# Altium PCB ap-pam-v4.PcbDoc (part 1 of 2)
Units mm, origin at the board's own origin, x right, y up, seen from the top; angles counter-clockwise.
Board outline 190.5 x 50.8 mm, 2 copper layers (Top Layer, Bottom Layer), stack 0.579 mm thick; 55 components, 33 nets, 351 pads, 1124 vias.
Unrouted connection lines stored in the file: 1.
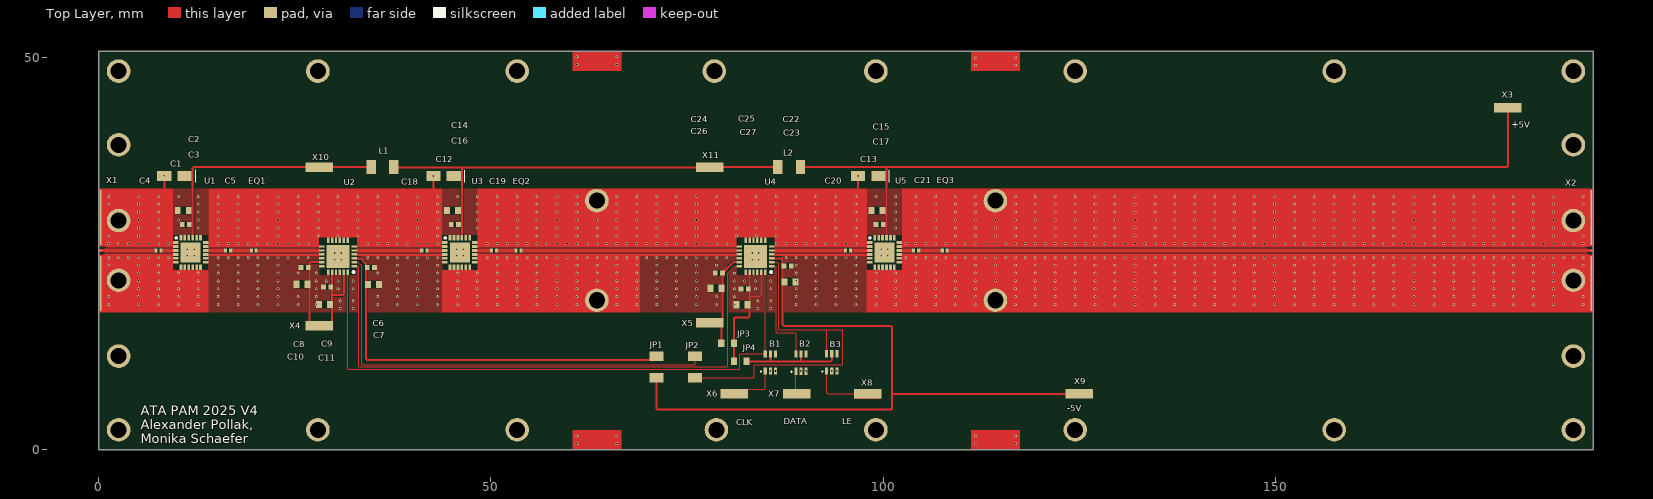
[diagram p0: Top Layer view]
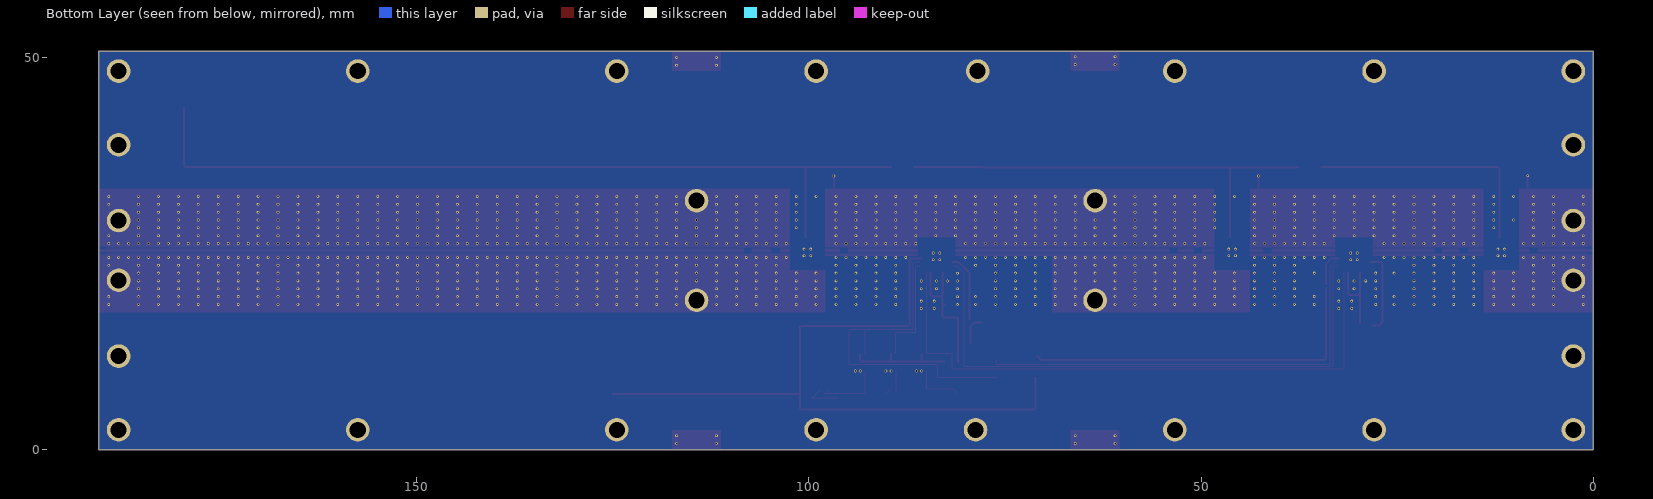
[diagram p1: Bottom Layer view, seen from below]
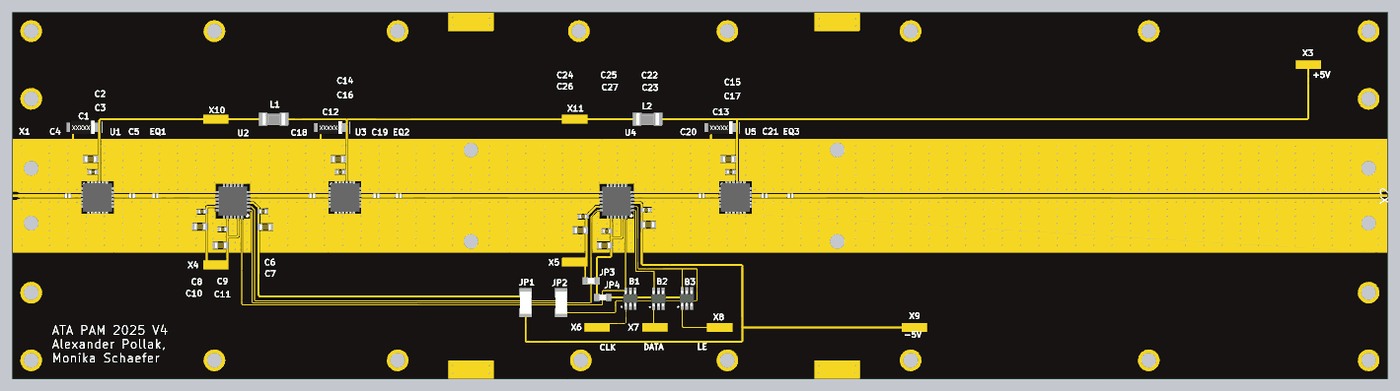
[diagram p2: 3D render of the assembled board from above, using the file's embedded part models]

## Layer stack, top to bottom
Top Layer: signal copper 0.0356
Dielectric 1: dielectric 0.508, Rogers 4350B, Dk 3.48
Bottom Layer: signal copper 0.0356

## Board outline
0,0 190.5,0 190.5,50.8 0,50.8

## Design rules (kind name [scope] priority, off if disabled: settings)
Clearance Clearance_1 [All] p1: gap=0.1 ignorepadtopadclearanceinfootprint=FALSE except(0.2: Via-Hole)
HoleSize [All] p1: absolutevalues=TRUE maxlimit=2.54 minlimit=0.2 maxpercent=80.000 minpercent=20.000
HoleToHoleClearance [All] p1: gap=0.2 allowstackedmicrovias=TRUE
MinimumSolderMaskSliver [All] p1: minsoldermaskwidth=0.1
PolygonConnect [All] p1: connectstyle=Direct reliefconductorwidth=0.254 reliefentries=4 polygonreliefangle="90 Angle" airgapwidth=0.254
RoutingVias [All] p1: holewidth=0.711 width=1.27 viastyle="Through Hole" minholewidth=0.2 minwidth=0.35 maxholewidth=0.711 maxwidth=1.27
SilkToSolderMaskClearance [IsPad] p1: minsilkscreentomaskgap=0.15 clearancetoexposedcopper=TRUE
SolderMaskExpansion [All] p1: expansion=0.102 istentingtop=FALSE
SupplyNets "Schematic Supply Nets" [InNet('GND')] p1: voltage=0.000
Width [All] p1: maxlimit=0.254 minlimit=0.1 preferedwidth=0.16
26 further rules are at their usual default settings.

## Components (designator, comment, footprint, x,y, rotation, side; value= is the part's Value field where it differs from the comment)
B1 "SN74LVC2G34MDCKREP" BUF_SN74LVC2G34MDCKREP 85.613,11.127 r90 top
B2 "SN74LVC2G34MDCKREP" BUF_SN74LVC2G34MDCKREP 89.508,11.103 r90 top
B3 "SN74LVC2G34MDCKREP" BUF_SN74LVC2G34MDCKREP 93.435,11.134 r90 top
C1 "4.7 uF" C4_7UF 9.661,34.908 r180 top value=4.7uF
C2 "1000 pF" C1000PF 10.786,30.49 r180 top value=1nF
C3 "100 pF" C100PF 11.101,28.71 r180 top
C4 "10nF" C10NF 7.62,25.4 r0 top
C5 "10nF" C10NF 16.51,25.4 r0 top
C6 "100 pF" C100PF 34.693,23.228 r0 top
C7 "1000 pF" C1000PF 35.008,21.06 r0 top value=1nF
C8 "100 pF" C100PF 26.237,23.209 r180 top
C9 "100 pF" C100PF 29.115,20.74 r180 top
C10 "1000 pF" C1000PF 25.922,21.102 r180 top value=1nF
C11 "1000 pF" C1000PF 28.8,18.514 r180 top value=1nF
C12 "4.7 uF" C4_7UF 43.963,34.888 r180 top value=4.7uF
C13 "4.7 uF" C4_7UF 98.087,34.888 r180 top value=4.7uF
C14 "1000 pF" C1000PF 45.087,30.49 r180 top value=1nF
C15 "1000 pF" C1000PF 99.212,30.49 r180 top value=1nF
C16 "100 pF" C100PF 45.402,28.71 r180 top
C17 "100 pF" C100PF 99.527,28.71 r180 top
C18 "10nF" C10NF 41.504,25.4 r0 top
C19 "10nF" C10NF 50.402,25.4 r0 top
C20 "10nF" C10NF 95.509,25.4 r0 top
C21 "10nF" C10NF 104.198,25.4 r0 top
C22 "100 pF" C100PF 87.814,23.419 r0 top
C23 "1000 pF" C1000PF 88.127,21.384 r0 top value=1nF
C24 "100 pF" C100PF 79.049,22.518 r180 top
C25 "100 pF" C100PF 82.328,20.488 r180 top
C26 "1000 pF" C1000PF 78.679,20.591 r180 top value=1nF
C27 "1000 pF" C1000PF 82.012,18.497 r180 top value=1nF
EQ1 "AEQ05472-10" EQ_AEQ05472 19.767,25.4 r0 top
EQ2 "AEQ05472-10" EQ_AEQ05472 53.507,25.4 r0 top
EQ3 "AEQ05472-10" EQ_AEQ05472 107.809,25.4 r0 top
JP1 "MCA12060Z0000ZP500" JP_MCA12060Z0000ZP500 71.084,10.549 r90 top value=0R
JP2 "MCA12060Z0000ZP500" JP_MCA12060Z0000ZP500 76.006,10.549 r90 top value=0R
JP3 "MCT06030Z0000ZP500" JP_small_MCT06030Z0000ZP500 80.162,13.574 r180 top value=0R
JP4 "MCT06030Z0000ZP500" JP_small_MCT06030Z0000ZP500 81.779,11.276 r180 top value=0R
L1 "HZ1206E152R-10" FB_HZ1206E152R-10 36.166,36.025 r0 top
L2 "HZ1206E152R-10" FB_HZ1206E152R-10 88.006,36.025 r0 top
U1 "MML098GQ4A" AMP_MML098GQ4A 11.735,25.15 r0 top
U2 "HMC1018ALP4E" ATT_HMC101018ALPE 30.499,24.65 r180 top
U3 "MML098GQ4A" AMP_MML098GQ4A 46.038,25.15 r0 top
U4 "HMC1018ALP4E" ATT_HMC101018ALPE 83.711,24.65 r180 top
U5 "MML098GQ4A" AMP_MML098GQ4A 100.163,25.15 r0 top
X1 "CPW Solder Pad" "CPW EDGE CONNECTOR" 0.25,25.4 r90 top
X2 "CPW Solder Pad" "CPW EDGE CONNECTOR" 190.25,25.4 r270 top
X3 "Solder Pad" "SOLDER PAD"#1 179.597,43.6 r90 top
X4 "Solder Pad" "SOLDER PAD"#1 28.126,15.808 r90 top
X5 "Solder Pad" "SOLDER PAD"#1 77.887,16.208 r270 top
X6 "Solder Pad" "SOLDER PAD"#2 83.275,7.144 r90 top
X7 "Solder Pad" "SOLDER PAD"#3 90.173,7.144 r90 top
X8 "Solder Pad" "SOLDER PAD"#4 96.192,7.111 r90 top
X9 "Solder Pad" "SOLDER PAD"#5 125,5.858 r90 top
X10 "Solder Pad" "Solder Pad"#1 23.126,35.975 r90 top
X11 "Solder Pad" "Solder Pad"#2 77.887,35.916 r90 top

## Footprints (in the part's own frame and the unit in brackets; to place one, negate y for a bottom-side part, rotate by r counter-clockwise, add the part's x,y. Pads: shape width x height; smd on the part's side, far side on the other; paste and mask are expansions set on the pad)
AMP_MML098GQ4A [mm]
  rect 0.7x0.35 smd: 1(-1.9,1.25) 2(-1.9,0.75) 3(-1.9,0.25) 4(-1.9,-0.25) 5(-1.9,-0.75) 6(-1.9,-1.25) 13(1.9,-1.25) 14(1.9,-0.75) 15(1.9,-0.25) 16(1.9,0.25) 17(1.9,0.75) 18(1.9,1.25)
  rect 0.7x0.35 on Top Paste: 1(-1.9,1.25) 2(-1.9,0.75) 3(-1.9,0.25) 4(-1.9,-0.25) 5(-1.9,-0.75) 6(-1.9,-1.25) 13(1.9,-1.25) 14(1.9,-0.75) 15(1.9,-0.25) 16(1.9,0.25) 17(1.9,0.75) 18(1.9,1.25)
  rect 0.35x0.7 smd: 7(-1.25,-1.9) 8(-0.75,-1.9) 9(-0.25,-1.9) 10(0.25,-1.9) 11(0.75,-1.9) 12(1.25,-1.9) 19(1.25,1.9) 20(0.75,1.9) 21(0.25,1.9) 22(-0.25,1.9) 23(-0.75,1.9) 24(-1.25,1.9)
  rect 0.35x0.7 on Top Paste: 7(-1.25,-1.9) 8(-0.75,-1.9) 9(-0.25,-1.9) 10(0.25,-1.9) 11(0.75,-1.9) 12(1.25,-1.9) 19(1.25,1.9) 20(0.75,1.9) 21(0.25,1.9) 22(-0.25,1.9) 23(-0.75,1.9) 24(-1.25,1.9)
  rect 2.55x2.55 smd: 25(0,0)
  rect 2.5x2.5 on Top Paste: 25(0,0)
  silkscreen extent -1.96,1.74 -1.76,1.94, body extent -2.05,-2.05 2.05,2.05, height 1.05
ATT_HMC101018ALPE [mm]
  rect 0.7x0.3 smd: 1(-2.05,1.25) 2(-2.05,0.75) 3(-2.05,0.25) 4(-2.05,-0.25) 5(-2.05,-0.75) 6(-2.05,-1.25) 13(2.05,-1.25) 14(2.05,-0.75) 15(2.05,-0.25) 16(2.05,0.25) 17(2.05,0.75) 18(2.05,1.25)
  rect 0.3x0.7 smd: 7(-1.25,-2.05) 8(-0.75,-2.05) 9(-0.25,-2.05) 10(0.25,-2.05) 11(0.75,-2.05) 12(1.25,-2.05) 19(1.25,2.05) 20(0.75,2.05) 21(0.25,2.05) 22(-0.25,2.05) 23(-0.75,2.05) 24(-1.25,2.05)
  rect 2.95x2.95 smd: 25(0,0)
  silkscreen extent -2.13,1.88 -1.88,2.12, body extent -2.05,-2.05 2.05,2.05, height 1
BUF_SN74LVC2G34MDCKREP [mm]
  rect 0.9x0.4 smd: 1(-1.1,0.65) 2(-1.1,0) 3(-1.1,-0.65) 4(1.1,-0.65) 5(1.1,0) 6(1.1,0.65)
  rect 0.9x0.4 on Top Paste: 1(-1.1,0.65) 2(-1.1,0) 3(-1.1,-0.65) 4(1.1,-0.65) 5(1.1,0) 6(1.1,0.65)
  silkscreen extent -1.16,1.2 -1.16,1.21, body extent -1.05,-1 1.05,1, height 1
C4_7UF [mm]
  rect 1.8x1.25 smd: 1(-1.3,0) 2(1.3,0)
  silkscreen extent -2.69,-0.76 -2.69,0.82, body extent -1.7,-0.95 1.7,0.95, height 1.84
C10NF [mm]
  rect 0.4x0.538 smd: 1(-0.325,0) 2(0.325,0)
  body extent -0.4,-0.3 0.4,0.3, height 0.14
C100PF [mm]
  rect 0.6x0.62 smd: 1(-0.46,0) 2(0.46,0)
  body extent -0.5,-0.25 0.5,0.25, height 0.55
C1000PF [mm]
  rect 0.75x0.94 smd: 1(-0.7,0) 2(0.7,0)
  body extent -0.8,-0.4 0.8,0.4, height 0.9
"CPW EDGE CONNECTOR" [mm]
  rect 0.1x0.2 smd paste-2539.97: 1(0,0)
  rect 7x0.2 smd paste-2539.97: 2(-4.217,0) 3(4.217,0)
  Top Layer region: -0.15,0.25 0.15,0.25 0.15,-0.25 0.269,-0.75 -0.269,-0.75 -0.15,-0.25
  Top Layer region: -0.55,0.25 -7.883,0.25 -7.883,-0.75 -0.383,-0.75 -0.55,-0.25
  Top Layer region: 0.55,0.25 7.883,0.25 7.883,-0.75 0.383,-0.75 0.55,-0.25
EQ_AEQ05472 [mm]
  rect 0.4x0.538 smd: 1(-0.3,0) 2(0.3,0)
  body extent -0.4,-0.3 0.4,0.3, height 0.14
FB_HZ1206E152R-10 [mm]
  rect 1.2x1.8 smd: 1(-1.45,0) 2(1.45,0)
  body extent -1.6,-0.8 1.6,0.8, height 1.3
JP_MCA12060Z0000ZP500 [mm]
  rect 1.256x1.758 smd paste+0 mask+0: 1(-1.376,0) 2(1.376,0)
  body extent -2.26,-1.13 2.25,1.13, height 0.25
JP_small_MCT06030Z0000ZP500 [mm]
  rect 0.8x1 smd: 1(-0.8,0) 2(0.8,0)
  body extent -0.77,-0.43 0.78,0.42, height 0.46
"SOLDER PAD"#1 [mm]
  rect 1.2x3.5 smd paste-2539.97: 1(0,0)
"SOLDER PAD"#2 [mm]
  rect 1.2x3.5 smd paste-2539.97: 1(0,2.275)
"SOLDER PAD"#3 [mm]
  rect 1.2x3.5 smd paste-2539.97: 1(0,1.173)
"SOLDER PAD"#4 [mm]
  rect 1.2x3.5 smd paste-2539.97: 1(0,-1.808)
"SOLDER PAD"#5 [mm]
  rect 1.2x3.5 smd paste-2539.97: 1(1.253,0)
"Solder Pad"#1 [mm]
  rect 1.2x3.5 smd paste-2539.97: 1(0.05,-5)
"Solder Pad"#2 [mm]
  rect 1.2x3.5 smd paste-2539.97: 1(0.109,0)

## Part data
B1 B2 B3: library part Buf_SN74LVC2G34MDCKREP, "Enhanced Product Dual Buffer Gate", Manufacturer_Name="Texas Instruments", Mouser Part Number=595-SN74L2G34MDCKREP, Datasheet Link=https://datasheet.datasheetarchive.com/originals/distributors/Datasheets-SFU2/DSASFU100028688.pdf, Geometry.Height=1.1mm, Manufacturer_Part_Number=SN74LVC2G34MDCKREP, Mouser Price/Stock=https://www.mouser.co.uk/ProductDetail/Texas-Instruments/SN74LVC2G34MDCKREP?qs=l4wu3mKjyfmQ87%252BWHVxJDg%3D%3D
C1 C12 C13: library part C7_4uF_TH3A475K010C2900, "Tantalum Capacitor, Polarized, Tantalum (dry/solid), 10V, 10% +Tol, 10% -Tol, 4.7uF, Surface Mount, 1306", Capacitor Type=Tantalum, Case/Package=1206, ESR (Equivalent Series Resistance)=2.9R, Leakage Current=500nA, Manufacturer="Vishay Sprague", Manufacturer Part Number=TH3A475K010C2900, Max Operating Temperature=150°C, Min Operating Temperature=-55°C, Package Shape=Rectangular, Package Style=SMTMeter, Rated DC Voltage (URdc)=10V, Ripple Current=160mA, Supplier Part Number=4924098, Tolerance  (fill in as +-)=10%, Category="Tantalum Capacitors", ComponentLink1Description=https://datasheet.ciiva.com:443/pdfs/VipMasterIC/IC/VISH/VISH-S-A0010085390/VISH-S-A0010085390-1.pdf?src-supplier=IHS+Markit, ComponentLink1URL=https://datasheet.ciiva.com:443/pdfs/VipMasterIC/IC/VISH/VISH-S-A0010085390/VISH-S-A0010085390-1.pdf?src-supplier=IHS+Markit, ComponentLink2Description=https://datasheet.ciiva.com/268/th3-268785.pdf?src-supplier=Digikey, ComponentLink2URL=https://datasheet.ciiva.com/268/th3-268785.pdf?src-supplier=Digikey, ComponentLink3Description=https://datasheet.ciiva.com/16360/th3-16360891.pdf?src-supplier=Future+Electronics, ComponentLink3URL=https://datasheet.ciiva.com/16360/th3-16360891.pdf?src-supplier=Future+Electronics, Dielectric Material=Tantalum, Height=1.6mm, JESD-609 Code=e3, Length=3.2mm, Mounting Technology="Surface Mount", Packaging="Tape and Reel", Pins=2, Polarity=Polarized, Pricing="2000=0.178, 4000=0.175, 6000=0.173, 8000=0.171, 10000=0.166 (USD)", Reach SVHC Compliant=Yes, Reference Standard=AEC-Q200, RoHS=Yes, RoHS Compliant=Yes, Stock=2000, Supplier="Future Electronics", Tan Delta=0.06, Terminal Finish=Tin, Termination="J BEND", Tolerance (fill in as +-)=10%, Width=1.6mm
C2 C7 C10 C11 C14 C15 C23 C26 C27: library part GCM1885C1H102FA16D, "Ceramic Capacitor, Multilayer, Ceramic, 50V, 1% +Tol, 1% -Tol, C0G, 30ppm/Cel TC, 0.001uF, Surface Mount, 0603", Capacitor Type=Ceramic, Case/Package=0603, Manufacturer=Murata, Max Operating Temperature=125°C, Min Operating Temperature=-55°C, Package Shape=Rectangular, Rated DC Voltage (URdc)=50V, Supplier Part Number=81-GCM1885C1H102FA6D, Temperature Characteristics Code=C0G, Tolerance  (fill in as +-)=1%, Category="Ceramic Capacitors", ComponentLink1Description=https://datasheet.ciiva.com:443/pdfs/VipMasterIC/IC/MURE/MURE-S-A0004370842/MURE-S-A0004372260-1.pdf?src-supplier=IHS+Markit, ComponentLink1URL=https://datasheet.ciiva.com:443/pdfs/VipMasterIC/IC/MURE/MURE-S-A0004370842/MURE-S-A0004372260-1.pdf?src-supplier=IHS+Markit, Dielectric Material=Ceramic, Manufacturer Part Number=GCM1885C1H102FA16D, Mounting Technology="Surface Mount", Multilayer=Yes, Packaging="Tape and Reel", Pins=2, Pricing="1=0.35, 10=0.229, 50=0.229, 100=0.138, 1000=0.092, 10000=0.074 (USD)", Reach SVHC Compliant=Yes, Reference Standard=AEC-Q200, RoHS=Yes, RoHS Compliant=Yes, Stock=27229, Supplier=Mouser, Termination=Wraparound, Tolerance (fill in as +-)=1%
C3 C6 C8 C9 C16 C17 C22 C24 C25: library part GRM1555C2A101FA01D, "Multilayer Ceramic Capacitors MLCC - SMD/SMT 100 pF 100 VDC 1% 0402 C0G (NP0)", Manufacturer=Murata, Supplier Part Number=81-GRM1555C2A11FA1D, Manufacturer Part Number=GRM1555C2A101FA01D, Pricing="1=0.18, 10=0.119, 50=0.119, 100=0.06, 1000=0.039, 10000=0.035 (USD)", RoHS=No, Stock=21646, Supplier=Mouser
C4 C5 C18 C19 C20 C21: library part C10nF_939113733510, Manufacturer=Murata, Manufacturer Part Number=939113733510, Supplier Part Number=961-939113733510, Pricing="1000=3.63, 10000=3.49 (USD)", RoHS=No, Stock=402, Supplier=Mouser
EQ1 EQ2 EQ3: library part EQ_AEQ05472-10, "Rf Filter Gain Equalizer 2SMD", Manufacturer="Knowles Dielectric Labs", Supplier Part Number=1761-1006-ND, ComponentLink1Description=http://www.mouser.com/ds/2/110/Dielectriclaboratories_EW_Series-340573.pdf?src-supplier=Mouser, ComponentLink1URL=http://www.mouser.com/ds/2/110/Dielectriclaboratories_EW_Series-340573.pdf?src-supplier=Mouser, ComponentLink2Description=http://www.knowlescapacitors.com/getattachment/69df7735-7ed2-4c4f-903b-a99acda4fa2d/Gain-Equalizers.aspx?src-supplier=Digikey, ComponentLink2URL=http://www.knowlescapacitors.com/getattachment/69df7735-7ed2-4c4f-903b-a99acda4fa2d/Gain-Equalizers.aspx?src-supplier=Digikey, Manufacturer Part Number=AEQ05472-10, Pricing="10=7.145, 20=6.5195, 30=6.203, 50=5.8498, 70=5.64214, 100=5.4415, 250=5.00556, 500=4.7401, 1000=4.51981 (USD)", RoHS=Yes, Stock=390, Supplier=Digikey
JP1 JP2: library part JP_MCA12060Z0000ZP500, "Fixed Resistor, Thin Film, 0.25W, 0ohm, Surface Mount, 1206", Case/Package=1206, Manufacturer=Vishay, Max Operating Temperature=125°C, Min Operating Temperature=-55°C, Package Height=0.55mm, Package Length=3.2mm, Package Shape=Rectangular, Package Width=1.6mm, Power=250mW, Rated Temperature=70°C, Resistor Type="FIXED RESISTOR", Supplier Part Number=594-MCA12060Z0000ZP5, Category="Chip SMD Resistors", Construction=Rectangular, JESD-609 Code=e3, Manufacturer Part Number=MCA12060Z0000ZP500, Mounting Technology="Surface Mount", Packaging="Tape and Reel", Pins=2, Pricing="1=0.44, 10=0.318, 50=0.245, 100=0.218, 1000=0.132, 10000=0.117 (USD)", Reach SVHC Compliant=Yes, Reference Standard=CECC40401-801, RoHS=Yes, RoHS Compliant=Yes, Stock=3183, Supplier=Mouser, Technology="THIN FILM", Terminal Finish=Nickel, Termination=Wraparound
JP3 JP4: library part JP_small_MCT06030Z0000ZP500, "Fixed Resistor, Thin Film, 0.1W, 0ohm, Surface Mount, 0603", Case/Package=0603, Manufacturer="Vishay Beyschlag", Max Operating Temperature=125°C, Min Operating Temperature=-55°C, Package Height=0.45mm, Package Length=1.55mm, Package Shape=Rectangular, Package Width=0.85mm, Power=100mW, Rated Temperature=70°C, Resistor Type="FIXED RESISTOR", Supplier Part Number=594-MCT06030Z0000ZP5, Category="Chip SMD Resistors", ComponentLink1Description=https://datasheet.ciiva.com:443/pdfs/VipMasterIC/IC/VISH/VISH-S-A0002473667/VISH-S-A0002473667-1.pdf?src-supplier=IHS+Markit, ComponentLink1URL=https://datasheet.ciiva.com:443/pdfs/VipMasterIC/IC/VISH/VISH-S-A0002473667/VISH-S-A0002473667-1.pdf?src-supplier=IHS+Markit, ComponentLink2Description=https://datasheet.ciiva.com/48524/mc-pro-48524221.pdf?src-supplier=Avnet, ComponentLink2URL=https://datasheet.ciiva.com/48524/mc-pro-48524221.pdf?src-supplier=Avnet, ComponentLink3Description=https://datasheet.ciiva.com/8901/mc-pro-8901833.pdf?src-supplier=Avnet, ComponentLink3URL=https://datasheet.ciiva.com/8901/mc-pro-8901833.pdf?src-supplier=Avnet, ComponentLink4Description=https://datasheet.ciiva.com/8898/mc-pro-8898078.pdf?src-supplier=Avnet, ComponentLink4URL=https://datasheet.ciiva.com/8898/mc-pro-8898078.pdf?src-supplier=Avnet, ComponentLink5Description=https://datasheet.ciiva.com/2471/mc-pro-2471991.pdf?src-supplier=Digikey, ComponentLink5URL=https://datasheet.ciiva.com/2471/mc-pro-2471991.pdf?src-supplier=Digikey, ComponentLink6Description=https://datasheet.ciiva.com/2471/mc-pro-2471992.pdf?src-supplier=Digikey, ComponentLink6URL=https://datasheet.ciiva.com/2471/mc-pro-2471992.pdf?src-supplier=Digikey, ComponentLink7Description=https://datasheet.ciiva.com/2471/mc-pro-2471993.pdf?src-supplier=Digikey, ComponentLink7URL=https://datasheet.ciiva.com/2471/mc-pro-2471993.pdf?src-supplier=Digikey, ComponentLink8Description=https://datasheet.ciiva.com/16451/mc-pro-16451398.pdf?src-supplier=Future+Electronics, ComponentLink8URL=https://datasheet.ciiva.com/16451/mc-pro-16451398.pdf?src-supplier=Future+Electronics, Construction=Rectangular, JESD-609 Code=e3, Manufacturer Part Number=MCT06030Z0000ZP500, Mounting Technology="Surface Mount", Packaging="Tape and Reel", Pins=2, Pricing="1=0.24, 10=0.09, 50=0.09, 100=0.063, 1000=0.04, 10000=0.028 (USD)", Reach SVHC Compliant=Yes, Reference Standard=CECC40401-801, RoHS=Yes, RoHS Compliant=Yes, Stock=102669, Supplier=Mouser, Technology="THIN FILM", Terminal Finish=Nickel, Termination=Wraparound
L1 L2: library part FB_HZ1206E152R-10, "Ferrite Chip, 1 Function(s), 0.5A, 2 Pin(s)", Case Code=1206, Clock Frequency=50MHz, Current Rating=500mA, DC Resistance-Max=300mR, Manufacturer=Laird, Manufacturer Series=HZ1206E152R, Max Operating Temperature=125°C, Min Operating Temperature=-55°C, Supplier Part Number=240-2548-1-ND, Category="Ferrite Beads and Chips", Channels=1, ComponentLink1Description=https://datasheet.ciiva.com:443/pdfs/VipMasterIC/IC/STWD/STWDS00487/STWDS00487-1.pdf?src-supplier=IHS+Markit, ComponentLink1URL=https://datasheet.ciiva.com:443/pdfs/VipMasterIC/IC/STWD/STWDS00487/STWDS00487-1.pdf?src-supplier=IHS+Markit, ComponentLink2Description=https://datasheet.ciiva.com/1013/hz1206e152r-10-b-1013323.pdf?src-supplier=Digikey, ComponentLink2URL=https://datasheet.ciiva.com/1013/hz1206e152r-10-b-1013323.pdf?src-supplier=Digikey, ComponentLink3Description=https://datasheet.ciiva.com/22622/1685976-22622840.pdf?src-supplier=Element14, ComponentLink3URL=https://datasheet.ciiva.com/22622/1685976-22622840.pdf?src-supplier=Element14, ComponentLink4Description=https://datasheet.ciiva.com/12396/hz1206e152r-10new-201540-12396726.pdf?src-supplier=Mouser, ComponentLink4URL=https://datasheet.ciiva.com/12396/hz1206e152r-10new-201540-12396726.pdf?src-supplier=Mouser, Construction="Chip Bead", Filter Type="FERRITE CHIP", Height=1.1mm, JESD-609 Code=e3, Length=3.2mm, Manufacturer Part Number=HZ1206E152R-10, Material=Ferrite, Min Frequency=50MHz, Mounting Technology="Surface Mount", Output Impedance=1.5kR, Packaging="Tape and Reel", Pricing="1=0.24, 10=0.164, 25=0.142, 50=0.127, 100=0.1134, 250=0.09704, 500=0.08584, 1000=0.07554 (USD)", Reach SVHC Compliant=Yes, RoHS=Yes, RoHS Compliant=Yes, Series=HZ1206E152R-10, Stock=35353, Supplier=Digikey, Terminal Finish=Nickel, Width=1.6mm
U1 U3 U5: library part amp_MML098GQ4A, "Low Noise Amplifier / Low current consumption / Low noise figure / Pb-free RoHS compliant QFN package / Ultra wideband performance / Positive bias / Ready for Space Qualification", Current (mA)=57, Frequency (GHz)=0.05-20.00, Voltage (VDC)=5.0, Gain (dB)=23.00, Noise Figure (dB)=2.3, Output P1dB (dBm)=12.00, Part Number=MML098GQ4A
U2 U4: library part Att_HMC1018ALP4E, "Attenuators Attenuators", Manufacturer_Name="Analog Devices", Mouser Part Number=584-HMC1018ALP4E, Datasheet Link=https://www.analog.com/media/en/technical-documentation/data-sheets/hmc1018a.pdf, Geometry.Height=1mm, Manufacturer_Part_Number=HMC1018ALP4E, Mouser Price/Stock=https://www.mouser.co.uk/ProductDetail/Analog-Devices/HMC1018ALP4E?qs=XflvcvBPbgW0VxFFfcxVBA%3D%3D
X1 X2: library part "RF  CPW Solder Pad", "Solder pad for RF Coplanar Waveguide Rogers 4350B Thickness 0.020\" Copper 1oz"
X3 X4 X5 X6 X7 X8 X9 X10 X11: "Pad to solder wires to"

## Free pads (board coordinates)
  round 3 hole 2.05 mask-2539.97: 1(2.54,2.54) 2(27.94,2.54) 3(53.34,2.54) 4(78.74,2.54) 5(99.06,2.54) 6(124.46,2.54) 7(157.48,2.54) 8(187.96,2.54) 9(187.96,48.26) 10(157.48,48.26) 11(124.46,48.26) 12(99.06,48.26) 13(78.47,48.26) 14(53.34,48.26) 15(27.94,48.26) 16(2.54,48.26) 17(2.54,38.862) 18(2.54,29.21) 19(2.54,21.59) 20(2.54,11.938) 21(187.96,38.862) 22(187.96,29.21) 23(187.96,21.59) 24(187.96,11.938) 25(63.5,31.75) 26(114.3,31.75) 27(114.3,19.05) 28(63.5,19.05)

## Via types
v1: diameter 0.35, hole 0.2, Top Layer to Bottom Layer, 1124 vias

## Nets (pads, with @x,y where several pads share a name; then routed paths per layer and width w, separated by ;. In a path a pad name is that pad's centre, name@x,y a point inside that pad or via, vN(x,y) a via of type N, cw(c..) or ccw(c..) an arc to the next point about the centre after c; other vN are vias at no path point)
+5V: C13.1 C15.1 C17.1 L2.2 U5.21@100.413,27.05 X3.1 | length 106.6
  Top Layer w0.254: L2.2 89.466,36.035 100.413,36.035 ; U5.21@100.413,27.05 100.413,36.035 ; X3.1 179.597,36.184 179.448,36.035 100.413,36.035
+5V_JP3: C25.1 C27.1 JP3.1 JP4.2 U4.20 U4.23 | length 17.7
  Top Layer w0.254: JP4.2@80.967,11.129 80.967,16.734 81.116,16.883 82.812,16.883 82.961,17.032 82.961,18.005 82.96,18.006 82.96,18.249 C27.1 ; C27.1@82.961,18.497 82.961,19.548 82.961,20.488 U4.20 ; 83.079,19.548 84.312,19.548 84.461,19.697 U4.23
+5V_JP4: B1.5@85.613,12.227 B2.5@89.508,12.203 B3.5@93.435,12.234 JP4.1 | length 13.5
  Top Layer w0.254: JP4.1@82.684,11.264 85.613,11.264 89.521,11.264 ; 85.613,11.279 B1.5@85.613,12.227 ; B2.5@89.521,12.19 89.521,11.264 ; B3.5@93.435,12.234 93.435,11.413 93.286,11.264 89.521,11.264
+5V_L1: C1.1 C2.1 C3.1 L1.1 U1.21@11.985,27.05 X10.1 | length 31.6
  Top Layer w0.254: U1.21@11.985,27.05 11.985,35.876 12.134,36.025 X10.1 L1.1
+5V_L2: C12.1 C14.1 C16.1 L1.2 L2.1 U3.21@46.288,27.05 X11.1 | length 57.9
  Top Layer w0.254: L1.2 37.637,36.004 46.265,36.004 77.866,36.004 X11.1 L2.1 ; U3.21@46.288,27.05 46.288,35.981
+5V_X4: C8.1 C9.1 C10.1 C11.1 U2.17 U2.20 U2.23 X4.1 | length 21.4
  Top Layer w0.254: X4.1 27.343,15.808 26.87,16.281 26.87,23.751 27.019,23.9 U2.17 ; X4.1@29.749,16.058 29.749,19.693 ; U2.20 29.749,19.693 ; U2.23 31.249,19.842 31.1,19.693 29.749,19.693
+5V_X5: C24.1 C26.1 JP3.2 U4.17 X5.1 | length 12.6
  Top Layer w0.254: X5.1 78.889,16.208 79.362,15.735 JP3.2 ; X5.1@79.513,16.565 79.513,20.457 C26.1 79.509,20.721 C24.1 79.509,22.528 80.881,23.9 U4.17
-5V: C22.1 C23.1 JP1.1 U4.3 X9.1 | length 92.4
  Top Layer w0.127: JP1.1 JP1.1@71.335,9.173
  Top Layer w0.254: JP1.1 71.084,5.251 71.233,5.102 100.977,5.102 101.126,5.251 101.126,7.111 101.126,15.652 100.977,15.801 87.327,15.801 87.178,15.95 87.178,21.384 87.178,23.419 87.178,24.249 87.027,24.4 U4.3 ; 101.151,7.111 X9.1
-5V_JP1: C6.1 C7.1 JP1.2 U2.3 | length 50.9
  Top Layer w0.127: JP1.2@70.833,11.925 JP1.2
  Top Layer w0.254: U2.3 33.383,24.4 34.06,23.723 C7.1@34.06,21.06 ; C7.1@34.059,20.694 34.059,11.573 34.208,11.424 70.183,11.424 ; 70.183,11.424 70.332,11.424 JP1.2@70.833,11.925
C4: C4.2 U1.3@9.835,25.4
C5: C5.2 EQ1.1
C18: C18.2 U3.3@44.138,25.4
C19: C19.2 EQ2.1
C20: C20.2 U5.3@98.263,25.4
C21: C21.2 EQ3.1
CLK: B1.1@84.963,10.027 X6.1 | length 6.5
  Top Layer w0.127: X6.1 81.537,7.681 84.87,7.681 84.963,7.773 B1.1@84.963,10.027
CLK_B: B1.6@84.963,12.227 U2.24 U4.24 | length 77.7
  Top Layer w0.127: U2.24 31.749,10.35 31.823,10.276 81.662,10.276 81.736,10.35 81.736,12.153 81.81,12.227 B1.6@84.961,12.227 ; U4.24 B1.6@84.961,12.227 ; B1.6@84.963,12.227 B1.6@84.961,12.227
DATA1: B2.1@88.858,10.003 X7.1 | length 3.7
  Top Layer w0.127: B2.1@88.858,10.003 88.858,7.286 X7.1 ; X7.1@89.636,7.681 X7.1@90.173,7.144
DATA1_B: B2.6@88.858,12.203 U4.1 | length 14.2
  Top Layer w0.127: U4.1 86.279,23.4 86.353,23.326 86.353,14.993 86.427,14.919 88.812,14.919 88.886,14.845 88.886,12.231 B2.6@88.858,12.203
DATA2: U2.1 U4.18 | length 74.2
  Top Layer w0.127: U2.1 33.106,23.4 33.18,23.326 33.18,10.623 33.254,10.549 80.086,10.549 80.16,10.623 80.16,22.51 81.05,23.4 U4.18
EQ1: EQ1.2 U2.14
EQ2: EQ2.2 U4.14
GND: B1.2@85.613,10.027 B1.3@86.263,10.027 B2.2@89.508,10.003 B2.3@90.158,10.003 B3.2@93.435,10.034 B3.3@94.085,10.034 C1.2 C2.2 C3.2 C6.2 C7.2 C8.2 C9.2 C10.2 C11.2 C12.2 C13.2 C14.2 C15.2 C16.2 C17.2 C22.2 C23.2 C24.2 C25.2 C26.2 C27.2 pad.1 pad.2 pad.3 pad.4 pad.5 pad.6 pad.7 pad.8 pad.9 pad.10 pad.11 pad.12 pad.13 pad.14 pad.15 pad.16 pad.17 pad.18 pad.19 pad.20 pad.21 pad.22 pad.23 pad.24 pad.25 pad.26 pad.27 pad.28 U1.1@9.835,26.4 U1.2@9.835,25.9 U1.4@9.835,24.9 U1.5@9.835,24.4 U1.6@9.835,23.9 U1.7@10.485,23.25 U1.8@10.985,23.25 U1.9@11.485,23.25 U1.10@11.985,23.25 U1.11@12.485,23.25 U1.12@12.985,23.25 U1.13@13.635,23.9 U1.14@13.635,24.4 U1.15@13.635,24.9 U1.17@13.635,25.9 U1.18@13.635,26.4 U1.19@12.985,27.05 U1.20@12.485,27.05 U1.22@11.485,27.05 U1.23@10.985,27.05 U1.24@10.485,27.05 U1.25@11.735,25.15 U2.4 U2.6 U2.7 U2.8 U2.9 U2.10 U2.11 U2.12 U2.13 U2.15 U2.16 U2.19 U2.21 U2.22 U2.25 U3.1@44.138,26.4 U3.2@44.138,25.9 U3.4@44.138,24.9 U3.5@44.138,24.4 U3.6@44.138,23.9 U3.7@44.788,23.25 U3.8@45.288,23.25 U3.9@45.788,23.25 U3.10@46.288,23.25 U3.11@46.788,23.25 U3.12@47.288,23.25 U3.13@47.938,23.9 U3.14@47.938,24.4 U3.15@47.938,24.9 U3.17@47.938,25.9 U3.18@47.938,26.4 U3.19@47.288,27.05 U3.20@46.788,27.05 U3.22@45.788,27.05 U3.23@45.288,27.05 U3.24@44.788,27.05 U3.25@46.038,25.15 U4.4 U4.6 U4.7 U4.8 U4.9 U4.10 U4.11 U4.12 U4.13 U4.15 U4.16 U4.19 U4.21 U4.22 U4.25 U5.1@98.263,26.4 U5.2@98.263,25.9 U5.4@98.263,24.9 U5.5@98.263,24.4 U5.6@98.263,23.9 U5.7@98.913,23.25 U5.8@99.413,23.25 U5.9@99.913,23.25 U5.10@100.413,23.25 U5.11@100.913,23.25 U5.12@101.413,23.25 U5.13@102.063,23.9 U5.14@102.063,24.4 U5.15@102.063,24.9 U5.17@102.063,25.9 U5.18@102.063,26.4 U5.19@101.413,27.05 U5.20@100.913,27.05 U5.22@99.913,27.05 U5.23@99.413,27.05 U5.24@98.913,27.05 U5.25@100.163,25.15 X1.2 X1.3 X2.2 X2.3 | length 5.6
  Top Layer w0.254: v1(8.361,34.908) 8.361,33.06 8.375,33.046 ; C12.2@42.664,34.908 42.664,33.06 42.678,33.046 ; C13.2@96.789,34.908 96.789,33.06 96.803,33.046
  other v1: 60.96,0.8 66.04,0.8 111.76,0.8 116.84,0.8 60.96,1.8 66.04,1.8 111.76,1.8 116.84,1.8 85.613,10.034 86.263,10.034 89.508,10.034 90.158,10.034 93.435,10.034 94.085,10.034 30.792,17.999 32.448,17.999 84.015,17.999 85.671,17.999 1.27,18.517 5.08,18.517 7.62,18.517 10.16,18.517 12.7,18.517 15.24,18.517 17.78,18.517 20.32,18.517 22.86,18.517 25.4,18.517 27.724,18.517 35.56,18.517 38.1,18.517 40.64,18.517 43.18,18.517 45.72,18.517 48.26,18.517 50.8,18.517 53.34,18.517 55.88,18.517 58.42,18.517 60.96,18.517 66.04,18.517 68.58,18.517 71.12,18.517 73.66,18.517 76.2,18.517 78.74,18.517 81.052,18.507 88.9,18.517 91.44,18.517 93.98,18.517 96.52,18.517 99.06,18.517 101.6,18.517 104.14,18.517 106.68,18.517 109.22,18.517 111.76,18.517 116.84,18.517 119.38,18.517 121.92,18.517 124.46,18.517 127,18.517 129.54,18.517 132.08,18.517 134.62,18.517 137.16,18.517 139.7,18.517 142.24,18.517 144.78,18.517 147.32,18.517 149.86,18.517 152.4,18.517 154.94,18.517 157.48,18.517 160.02,18.517 162.56,18.517 165.1,18.517 167.64,18.517 170.18,18.517 172.72,18.517 175.26,18.517 177.8,18.517 180.34,18.517 182.88,18.517 185.42,18.517 189.23,18.517 30.792,18.953 32.448,18.953 84.015,18.953 85.671,18.953 1.27,19.517 5.08,19.517 7.62,19.517 10.16,19.517 12.7,19.517 15.24,19.517 17.78,19.517 20.32,19.517 22.86,19.517 25.4,19.517 27.724,19.517 35.56,19.517 38.1,19.517 40.64,19.517 43.18,19.517 45.72,19.517 48.26,19.517 50.8,19.517 53.34,19.517 55.88,19.517 58.42,19.517 60.96,19.517 66.04,19.517 68.58,19.517 71.12,19.517 73.66,19.517 76.2,19.517 78.74,19.517 81.052,19.507 88.9,19.517 91.44,19.517 93.98,19.517 96.52,19.517 99.06,19.517 101.6,19.517 104.14,19.517 106.68,19.517 109.22,19.517 111.76,19.517 116.84,19.517 119.38,19.517 121.92,19.517 124.46,19.517 127,19.517 129.54,19.517 132.08,19.517 134.62,19.517 137.16,19.517 139.7,19.517 142.24,19.517 144.78,19.517 147.32,19.517 149.86,19.517 152.4,19.517 154.94,19.517 157.48,19.517 160.02,19.517 162.56,19.517 165.1,19.517 167.64,19.517 170.18,19.517 172.72,19.517 175.26,19.517 177.8,19.517 180.34,19.517 182.88,19.517 185.42,19.517 189.23,19.517 30.488,20.507 32.448,20.507 81.052,20.507 83.711,20.507 85.671,20.507 5.08,20.517 7.62,20.517 10.16,20.517 12.7,20.517 15.24,20.517 17.78,20.517 20.32,20.517 22.86,20.517 27.724,20.517 38.1,20.517 40.64,20.517 43.18,20.517 45.72,20.517 48.26,20.517 50.8,20.517 53.34,20.517 55.88,20.517 58.42,20.517 60.96,20.517 66.04,20.517 68.58,20.517 71.12,20.517 73.66,20.517 76.2,20.517 88.9,20.517 91.44,20.517 93.98,20.517 96.52,20.517 99.06,20.517 101.6,20.517 104.14,20.517 106.68,20.517 109.22,20.517 111.76,20.517 116.84,20.517 119.38,20.517 121.92,20.517 124.46,20.517 127,20.517 129.54,20.517 132.08,20.517 134.62,20.517 137.16,20.517 139.7,20.517 142.24,20.517 144.78,20.517 147.32,20.517 149.86,20.517 152.4,20.517 154.94,20.517 157.48,20.517 160.02,20.517 162.56,20.517 165.1,20.517 167.64,20.517 170.18,20.517 172.72,20.517 175.26,20.517 177.8,20.517 180.34,20.517 182.88,20.517 185.42,20.517 5.08,21.517 7.62,21.517 10.16,21.517 12.7,21.517 15.24,21.517 17.78,21.517 20.32,21.517 22.86,21.517 27.724,21.517 28.994,21.517 30.488,21.507 32.448,21.507 38.1,21.517 40.64,21.517 43.18,21.517 45.72,21.517 48.26,21.517 50.8,21.517 53.34,21.517 55.88,21.517 58.42,21.517 60.96,21.517 63.5,21.517 66.04,21.517 68.58,21.517 71.12,21.517 73.66,21.517 76.2,21.517 81.052,21.507 82.322,21.507 83.711,21.507 85.671,21.507 88.9,21.517 91.44,21.517 93.98,21.517 96.52,21.517 99.06,21.517 101.6,21.517 104.14,21.517 106.68,21.517 109.22,21.517 111.76,21.517 114.3,21.517 116.84,21.517 119.38,21.517 121.92,21.517 124.46,21.517 127,21.517 129.54,21.517 132.08,21.517 134.62,21.517 137.16,21.517 139.7,21.517 142.24,21.517 144.78,21.517 147.32,21.517 149.86,21.517 152.4,21.517 154.94,21.517 157.48,21.517 160.02,21.517 162.56,21.517 165.1,21.517 167.64,21.517 170.18,21.517 172.72,21.517 175.26,21.517 177.8,21.517 180.34,21.517 182.88,21.517 185.42,21.517 5.08,22.517 7.62,22.517 10.16,22.517 12.7,22.517 15.24,22.517 17.78,22.517 20.32,22.517 22.86,22.517 25.4,22.517 27.724,22.517 35.56,22.517 38.1,22.517 40.64,22.517 43.18,22.517 45.72,22.517 48.26,22.517 50.8,22.517 53.34,22.517 55.88,22.517 58.42,22.517 60.96,22.517 63.5,22.517 66.04,22.517 68.58,22.517 71.12,22.517 73.66,22.517 76.2,22.517 81.052,22.507 88.9,22.517 91.44,22.517 93.98,22.517 96.52,22.517 99.06,22.517 101.6,22.517 104.14,22.517 106.68,22.517 109.22,22.517 111.76,22.517 114.3,22.517 116.84,22.517 119.38,22.517 121.92,22.517 124.46,22.517 127,22.517 129.54,22.517 132.08,22.517 134.62,22.517 137.16,22.517 139.7,22.517 142.24,22.517 144.78,22.517 147.32,22.517 149.86,22.517 152.4,22.517 154.94,22.517 157.48,22.517 160.02,22.517 162.56,22.517 165.1,22.517 167.64,22.517 170.18,22.517 172.72,22.517 175.26,22.517 177.8,22.517 180.34,22.517 182.88,22.517 185.42,22.517 1.27,23.517 5.08,23.517 7.62,23.517 15.24,23.517 17.78,23.517 20.32,23.517 22.86,23.517 38.1,23.517 40.64,23.517 43.18,23.517 50.8,23.517 53.34,23.517 55.88,23.517 58.42,23.517 60.96,23.517 63.5,23.517 66.04,23.517 68.58,23.517 71.12,23.517 73.66,23.517 76.2,23.517 78.74,23.517 88.9,23.517 91.44,23.517 93.98,23.517 96.52,23.517 104.14,23.517 106.68,23.517 109.22,23.517 111.76,23.517 114.3,23.517 116.84,23.517 119.38,23.517 121.92,23.517 124.46,23.517 127,23.517 129.54,23.517 132.08,23.517 134.62,23.517 137.16,23.517 139.7,23.517 142.24,23.517 144.78,23.517 147.32,23.517 149.86,23.517 152.4,23.517 154.94,23.517 157.48,23.517 160.02,23.517 162.56,23.517 165.1,23.517 167.64,23.517 170.18,23.517 172.72,23.517 175.26,23.517 177.8,23.517 180.34,23.517 182.88,23.517 185.42,23.517 189.23,23.517 30.074,24.225 30.924,24.225 83.286,24.225 84.136,24.225 1.27,24.517 2.54,24.517 3.81,24.517 5.08,24.517 6.35,24.517 7.62,24.517 8.89,24.517 15.24,24.517 16.51,24.517 17.78,24.517 19.05,24.517 20.32,24.517 21.59,24.517 22.86,24.517 24.13,24.517 25.4,24.517 26.67,24.517 34.29,24.517 35.56,24.517 36.83,24.517 38.1,24.517 39.37,24.517 40.64,24.517 41.91,24.517 43.18,24.517 49.53,24.517 50.8,24.517 52.07,24.517 53.34,24.517 54.61,24.517 55.88,24.517 57.15,24.517 58.42,24.517 59.69,24.517 60.96,24.517 62.23,24.517 63.5,24.517 64.77,24.517 66.04,24.517 67.31,24.517 68.58,24.517 69.85,24.517 71.12,24.517 72.39,24.517 73.66,24.517 74.93,24.517 76.2,24.517 77.47,24.517 78.74,24.517 80.01,24.517 87.63,24.517 88.9,24.517 90.17,24.517 91.44,24.517 92.71,24.517 93.98,24.517 95.25,24.517 96.52,24.517 102.87,24.517 104.14,24.517 105.41,24.517 106.68,24.517 107.95,24.517 109.22,24.517 110.49,24.517 111.76,24.517 113.03,24.517 114.3,24.517 115.57,24.517 116.84,24.517 118.11,24.517 119.38,24.517 120.65,24.517 121.92,24.517 123.19,24.517 124.46,24.517 125.73,24.517 127,24.517 128.27,24.517 129.54,24.517 130.81,24.517 132.08,24.517 133.35,24.517 134.62,24.517 135.89,24.517 137.16,24.517 138.43,24.517 139.7,24.517 140.97,24.517 142.24,24.517 143.51,24.517 144.78,24.517 146.05,24.517 147.32,24.517 148.59,24.517 149.86,24.517 151.13,24.517 152.4,24.517 153.67,24.517 154.94,24.517 156.21,24.517 157.48,24.517 158.75,24.517 160.02,24.517 161.29,24.517 162.56,24.517 163.83,24.517 165.1,24.517 166.37,24.517 167.64,24.517 168.91,24.517 170.18,24.517 171.45,24.517 172.72,24.517 173.99,24.517 175.26,24.517 176.53,24.517 177.8,24.517 179.07,24.517 180.34,24.517 181.61,24.517 182.88,24.517 184.15,24.517 185.42,24.517 186.69,24.517 187.96,24.517 189.23,24.517 11.31,24.725 12.16,24.725 45.613,24.725 46.463,24.725 99.738,24.725 100.588,24.725 30.074,25.075 30.924,25.075 83.286,25.075 84.136,25.075 11.31,25.575 12.16,25.575 45.613,25.575 46.463,25.575 99.738,25.575 100.588,25.575 1.27,26.283 2.54,26.283 3.81,26.283 5.08,26.283 6.35,26.283 7.62,26.283 8.89,26.283 15.24,26.283 16.51,26.283 17.78,26.283 19.05,26.283 20.32,26.283 21.59,26.283 22.86,26.283 24.13,26.283 25.4,26.283 26.67,26.283 34.29,26.283 35.56,26.283 36.83,26.283 38.1,26.283 39.37,26.283 40.64,26.283 41.91,26.283 43.18,26.283 49.53,26.283 50.8,26.283 52.07,26.283 53.34,26.283 54.61,26.283 55.88,26.283 57.15,26.283 58.42,26.283 59.69,26.283 60.96,26.283 62.23,26.283 63.5,26.283 64.77,26.283 66.04,26.283 67.31,26.283 68.58,26.283 69.85,26.283 71.12,26.283 72.39,26.283 73.66,26.283 74.93,26.283 76.2,26.283 77.47,26.283 78.74,26.283 80.01,26.283 86.36,26.283 87.63,26.283 88.9,26.283 90.17,26.283 91.44,26.283 92.71,26.283 93.98,26.283 95.25,26.283 96.52,26.283 102.87,26.283 104.14,26.283 105.41,26.283 106.68,26.283 107.95,26.283 109.22,26.283 110.49,26.283 111.76,26.283 113.03,26.283 114.3,26.283 115.57,26.283 116.84,26.283 118.11,26.283 119.38,26.283 120.65,26.283 121.92,26.283 123.19,26.283 124.46,26.283 125.73,26.283 127,26.283 128.27,26.283 129.54,26.283 130.81,26.283 132.08,26.283 133.35,26.283 134.62,26.283 135.89,26.283 137.16,26.283 138.43,26.283 139.7,26.283 140.97,26.283 142.24,26.283 143.51,26.283 144.78,26.283 146.05,26.283 147.32,26.283 148.59,26.283 149.86,26.283 151.13,26.283 152.4,26.283 153.67,26.283 154.94,26.283 156.21,26.283 157.48,26.283 158.75,26.283 160.02,26.283 161.29,26.283 162.56,26.283 163.83,26.283 165.1,26.283 166.37,26.283 167.64,26.283 168.91,26.283 170.18,26.283 171.45,26.283 172.72,26.283 173.99,26.283 175.26,26.283 176.53,26.283 177.8,26.283 179.07,26.283 180.34,26.283 181.61,26.283 182.88,26.283 184.15,26.283 185.42,26.283 186.69,26.283 187.96,26.283 189.23,26.283 1.27,27.283 5.08,27.283 7.62,27.283 15.24,27.283 17.78,27.283 20.32,27.283 22.86,27.283 25.4,27.283 27.94,27.283 30.48,27.283 33.02,27.283 35.56,27.283 38.1,27.283 40.64,27.283 43.18,27.283 50.8,27.283 53.34,27.283 55.88,27.283 58.42,27.283 60.96,27.283 63.5,27.283 66.04,27.283 68.58,27.283 71.12,27.283 73.66,27.283 76.2,27.283 78.74,27.283 81.28,27.283 83.82,27.283 86.36,27.283 88.9,27.283 91.44,27.283 93.98,27.283 96.52,27.283 104.14,27.283 106.68,27.283 109.22,27.283 111.76,27.283 114.3,27.283 116.84,27.283 119.38,27.283 121.92,27.283 124.46,27.283 127,27.283 129.54,27.283 132.08,27.283 134.62,27.283 137.16,27.283 139.7,27.283 142.24,27.283 144.78,27.283 147.32,27.283 149.86,27.283 152.4,27.283 154.94,27.283 157.48,27.283 160.02,27.283 162.56,27.283 165.1,27.283 167.64,27.283 170.18,27.283 172.72,27.283 175.26,27.283 177.8,27.283 180.34,27.283 182.88,27.283 185.42,27.283 189.23,27.283 5.08,28.283 7.62,28.283 12.7,28.283 15.24,28.283 17.78,28.283 20.32,28.283 22.86,28.283 25.4,28.283 27.94,28.283 30.48,28.283 33.02,28.283 35.56,28.283 38.1,28.283 40.64,28.283 43.18,28.283 48.26,28.283 50.8,28.283 53.34,28.283 55.88,28.283 58.42,28.283 60.96,28.283 63.5,28.283 66.04,28.283 68.58,28.283 71.12,28.283 73.66,28.283 76.2,28.283 78.74,28.283 81.28,28.283 83.82,28.283 86.36,28.283 88.9,28.283 91.44,28.283 93.98,28.283 96.52,28.283 101.6,28.283 104.14,28.283 106.68,28.283 109.22,28.283 111.76,28.283 114.3,28.283 116.84,28.283 119.38,28.283 121.92,28.283 124.46,28.283 127,28.283 129.54,28.283 132.08,28.283 134.62,28.283 137.16,28.283 139.7,28.283 142.24,28.283 144.78,28.283 147.32,28.283 149.86,28.283 152.4,28.283 154.94,28.283 157.48,28.283 160.02,28.283 162.56,28.283 165.1,28.283 167.64,28.283 170.18,28.283 172.72,28.283 175.26,28.283 177.8,28.283 180.34,28.283 182.88,28.283 185.42,28.283 5.08,29.283 7.62,29.283 10.16,29.283 12.7,29.283 15.24,29.283 17.78,29.283 20.32,29.283 22.86,29.283 25.4,29.283 27.94,29.283 30.48,29.283 33.02,29.283 35.56,29.283 38.1,29.283 40.64,29.283 43.18,29.283 48.26,29.283 50.8,29.283 53.34,29.283 55.88,29.283 58.42,29.283 60.96,29.283 63.5,29.283 66.04,29.283 68.58,29.283 71.12,29.283 73.66,29.283 76.2,29.283 78.74,29.283 81.28,29.283 83.82,29.283 86.36,29.283 88.9,29.283 91.44,29.283 93.98,29.283 96.52,29.283 101.6,29.283 104.14,29.283 106.68,29.283 109.22,29.283 111.76,29.283 114.3,29.283 116.84,29.283 119.38,29.283 121.92,29.283 124.46,29.283 127,29.283 129.54,29.283 132.08,29.283 134.62,29.283 137.16,29.283 139.7,29.283 142.24,29.283 144.78,29.283 147.32,29.283 149.86,29.283 152.4,29.283 154.94,29.283 157.48,29.283 160.02,29.283 162.56,29.283 165.1,29.283 167.64,29.283 170.18,29.283 172.72,29.283 175.26,29.283 177.8,29.283 180.34,29.283 182.88,29.283 185.42,29.283 5.08,30.283 7.62,30.283 12.7,30.283 15.24,30.283 17.78,30.283 20.32,30.283 22.86,30.283 25.4,30.283 27.94,30.283 30.48,30.283 33.02,30.283 35.56,30.283 38.1,30.283 40.64,30.283 43.18,30.283 48.26,30.283 50.8,30.283 53.34,30.283 55.88,30.283 58.42,30.283 60.96,30.283 66.04,30.283 68.58,30.283 71.12,30.283 73.66,30.283 76.2,30.283 78.74,30.283 81.28,30.283 83.82,30.283 86.36,30.283 88.9,30.283 91.44,30.283 93.98,30.283 96.52,30.283 101.6,30.283 104.14,30.283 106.68,30.283 109.22,30.283 111.76,30.283 116.84,30.283 119.38,30.283 121.92,30.283 124.46,30.283 127,30.283 129.54,30.283 132.08,30.283 134.62,30.283 137.16,30.283 139.7,30.283 142.24,30.283 144.78,30.283 147.32,30.283 149.86,30.283 152.4,30.283 154.94,30.283 157.48,30.283 160.02,30.283 162.56,30.283 165.1,30.283 167.64,30.283 170.18,30.283 172.72,30.283 175.26,30.283 177.8,30.283 180.34,30.283 182.88,30.283 185.42,30.283 1.27,31.283 5.08,31.283 7.62,31.283 12.7,31.283 15.24,31.283 17.78,31.283 20.32,31.283 22.86,31.283 25.4,31.283 27.94,31.283 30.48,31.283 33.02,31.283 35.56,31.283 38.1,31.283 40.64,31.283 43.18,31.283 48.26,31.283 50.8,31.283 53.34,31.283 55.88,31.283 58.42,31.283 60.96,31.283 66.04,31.283 68.58,31.283 71.12,31.283 73.66,31.283 76.2,31.283 78.74,31.283 81.28,31.283 83.82,31.283 86.36,31.283 88.9,31.283 91.44,31.283 93.98,31.283 96.52,31.283 101.6,31.283 104.14,31.283 106.68,31.283 109.22,31.283 111.76,31.283 116.84,31.283 119.38,31.283 121.92,31.283 124.46,31.283 127,31.283 129.54,31.283 132.08,31.283 134.62,31.283 137.16,31.283 139.7,31.283 142.24,31.283 144.78,31.283 147.32,31.283 149.86,31.283 152.4,31.283 154.94,31.283 157.48,31.283 160.02,31.283 162.56,31.283 165.1,31.283 167.64,31.283 170.18,31.283 172.72,31.283 175.26,31.283 177.8,31.283 180.34,31.283 182.88,31.283 185.42,31.283 189.23,31.283 1.27,32.283 5.08,32.283 7.62,32.283 10.16,32.283 12.7,32.283 15.24,32.283 17.78,32.283 20.32,32.283 22.86,32.283 25.4,32.283 27.94,32.283 30.48,32.283 33.02,32.283 35.56,32.283 38.1,32.283 40.64,32.283 43.18,32.283 45.72,32.283 48.26,32.283 50.8,32.283 53.34,32.283 55.88,32.283 58.42,32.283 60.96,32.283 66.04,32.283 68.58,32.283 71.12,32.283 73.66,32.283 76.2,32.283 78.74,32.283 81.28,32.283 83.82,32.283 86.36,32.283 88.9,32.283 91.44,32.283 93.98,32.283 96.52,32.283 99.06,32.283 101.6,32.283 104.14,32.283 106.68,32.283 109.22,32.283 111.76,32.283 116.84,32.283 119.38,32.283 121.92,32.283 124.46,32.283 127,32.283 129.54,32.283 132.08,32.283 134.62,32.283 137.16,32.283 139.7,32.283 142.24,32.283 144.78,32.283 147.32,32.283 149.86,32.283 152.4,32.283 154.94,32.283 157.48,32.283 160.02,32.283 162.56,32.283 165.1,32.283 167.64,32.283 170.18,32.283 172.72,32.283 175.26,32.283 177.8,32.283 180.34,32.283 182.88,32.283 185.42,32.283 189.23,32.283 42.663,34.888 96.787,34.888 111.76,49 116.84,49 60.96,49.1 66.04,49.1 111.76,50 116.84,50 60.96,50.1 66.04,50.1
LE: B3.1@92.785,10.034 X8.1 | length 13.6
  Top Layer w0.127: B3.1@92.785,10.034 92.785,7.26 92.934,7.111 X8.1 X8.1@97.463,7.648 ; X8.1@96.31,6.574 99.627,6.574 99.633,6.58 X8.1@98.604,7.609
LE_B: B3.6@92.785,12.234 JP2.1 U4.2 | length 45.4
  Top Layer w0.127: JP2.1 83.477,9.173 83.551,9.247 83.551,10.757 83.625,10.831 94.78,10.831 94.854,10.905 94.854,15.194 94.78,15.268 92.785,15.268 ; U4.2 86.509,23.9 86.678,23.731 86.678,15.342 86.752,15.268 92.785,15.268 ; B3.6@92.785,12.234 92.785,15.268
LE_B_JP2: JP2.2 U2.2 | length 56.8
  Top Layer w0.127: U2.2 33.048,23.9 33.517,23.431 33.517,10.895 33.591,10.821 75.942,10.821 76.016,10.895 JP2.2@76.016,11.412
RFin: C4.1 X1.1
RFout: EQ3.2 X2.1
U1: C5.1 U1.16@13.635,25.4
U2: C18.1 U2.5
U3: C19.1 U3.16@47.938,25.4
U4: C20.1 U4.5
U5: C21.1 U5.16@102.063,25.4
pads on no net: B1.1@84.963,10.027 B1.2@85.613,10.027 B1.3@86.263,10.027 B1.4 B1.5@85.613,12.227 B1.6@84.963,12.227 B2.1@88.858,10.003 B2.2@89.508,10.003 B2.3@90.158,10.003 B2.4 B2.5@89.508,12.203 B2.6@88.858,12.203 B3.1@92.785,10.034 B3.2@93.435,10.034 B3.3@94.085,10.034 B3.4 B3.5@93.435,12.234 B3.6@92.785,12.234 U1.1@9.835,26.4 U1.2@9.835,25.9 U1.3@9.835,25.4 U1.4@9.835,24.9 U1.5@9.835,24.4 U1.6@9.835,23.9 U1.7@10.485,23.25 U1.8@10.985,23.25 U1.9@11.485,23.25 U1.10@11.985,23.25 U1.11@12.485,23.25 U1.12@12.985,23.25 U1.13@13.635,23.9 U1.14@13.635,24.4 U1.15@13.635,24.9 U1.16@13.635,25.4 U1.17@13.635,25.9 U1.18@13.635,26.4 U1.19@12.985,27.05 U1.20@12.485,27.05 U1.21@11.985,27.05 U1.22@11.485,27.05 U1.23@10.985,27.05 U1.24@10.485,27.05 U1.25@11.735,25.15 U2.18 U3.1@44.138,26.4 U3.2@44.138,25.9 U3.3@44.138,25.4 U3.4@44.138,24.9 U3.5@44.138,24.4 U3.6@44.138,23.9 U3.7@44.788,23.25 U3.8@45.288,23.25 U3.9@45.788,23.25 U3.10@46.288,23.25 U3.11@46.788,23.25 U3.12@47.288,23.25 U3.13@47.938,23.9 U3.14@47.938,24.4 U3.15@47.938,24.9 U3.16@47.938,25.4 U3.17@47.938,25.9 U3.18@47.938,26.4 U3.19@47.288,27.05 U3.20@46.788,27.05 U3.21@46.288,27.05 U3.22@45.788,27.05 U3.23@45.288,27.05 U3.24@44.788,27.05 U3.25@46.038,25.15 U5.1@98.263,26.4 U5.2@98.263,25.9 U5.3@98.263,25.4 U5.4@98.263,24.9 U5.5@98.263,24.4 U5.6@98.263,23.9 U5.7@98.913,23.25 U5.8@99.413,23.25 U5.9@99.913,23.25 U5.10@100.413,23.25 U5.11@100.913,23.25 U5.12@101.413,23.25 U5.13@102.063,23.9 U5.14@102.063,24.4 U5.15@102.063,24.9 U5.16@102.063,25.4 U5.17@102.063,25.9 U5.18@102.063,26.4 U5.19@101.413,27.05 U5.20@100.913,27.05 U5.21@100.413,27.05 U5.22@99.913,27.05 U5.23@99.413,27.05 U5.24@98.913,27.05 U5.25@100.163,25.15

## Polygon pours and split planes (outlines as drawn)
GND on Bottom Layer "GND_L02_P000" (solid, pour order 0): 0,0 190.5,0 190.5,50.8 0,50.8
GND on Top Layer "GND_L01_P019" (solid, pour order 19): 43.78,27.399 43.78,33.283 48.288,33.283 48.292,33.279 48.292,27.399
GND on Top Layer "GND_L01_P018" (solid, pour order 18): 9.477,27.399 9.477,33.283 13.985,33.283 13.989,33.279 13.989,27.399
GND on Top Layer "GND_L01_P020" (solid, pour order 20): 97.905,27.399 97.905,33.283 102.413,33.283 102.417,33.279 102.417,27.399
GND on Top Layer "GND_L01_P015" (solid, pour order 15): 69.007,17.517 69.007,24.731 81.312,24.731 81.312,22.252 86.11,22.252 86.11,24.742 97.914,24.744 97.914,17.517
GND on Top Layer "GND_L01_P017" (solid, pour order 17): 13.984,17.517 13.984,24.725 28.1,24.725 28.1,22.25 32.898,22.25 32.898,24.744 43.791,24.744 43.77,17.517

## Other copper
Top Layer:
  rectangle net GND: 13.985,25.783 28.099,33.283
  rectangle net GND: 189.492,17.517 189.5,17.528
  region net GND: 1.047,17.586 1,17.586 1,17.517 1.047,17.517
  region net GND: 1.047,25.017 1,25.017 1,24.947 1.047,24.947
  region net GND: 1.047,33.283 1,33.283 1,33.214 1.047,33.214
  rectangle net GND: 1,25.783 1.047,25.853
  rectangle net GND: 189.492,33.272 189.5,33.283
  rectangle net GND: 189.492,25.005 189.5,25.017
  rectangle net GND: 102.411,17.517 189.5,25.017
  rectangle net RFout: 108.282,25.131 189.5,25.669
  rectangle net GND: 189.492,25.783 189.5,25.795
  rectangle net GND: 102.411,25.783 189.502,33.283
  rectangle net RFin: 1,25.131 7.105,25.669
  rectangle net GND: 28.092,25.783 28.099,25.791
  region net GND: 32.905,25.791 32.898,25.791 32.898,25.783 32.905,25.783
  region net GND: 86.117,25.791 86.11,25.791 86.11,25.783 86.117,25.783
  rectangle net GND: 32.898,25.783 43.79,33.283
  rectangle net GND: 81.305,25.783 81.312,25.791
  rectangle net GND: 1,25.783 9.488,33.283
  rectangle net GND: 48.285,25.783 81.312,33.283
  rectangle net GND: 86.11,25.783 97.916,33.283
  rectangle net C4: 8.136,25.131 9.375,25.669
  rectangle net EQ1: 20.263,25.131 27.958,25.669
  rectangle net U2: 33.04,25.131 40.992,25.669
  rectangle net GND: 28.056,27.047 32.957,33.283
  rectangle net C21: 104.72,25.131 107.319,25.669
  rectangle net U5: 102.523,25.131 103.678,25.669
  rectangle net C20: 96.03,25.131 97.803,25.669
  rectangle net GND: 97.895,17.517 102.46,22.901
  rectangle net C19: 50.923,25.131 53.011,25.669
  rectangle net U3: 48.399,25.131 49.892,25.669
  rectangle net C18: 42.026,25.131 43.677,25.669
  rectangle net GND: 43.751,17.517 48.316,22.901
  rectangle net EQ2: 54.004,25.131 81.17,25.669
  rectangle net GND: 81.305,27.047 86.13,33.283
  rectangle net GND: 32.898,24.722 43.791,25.017
  rectangle net GND: 69.011,24.722 81.312,25.017
  rectangle net U4: 86.252,25.131 94.991,25.669
  rectangle net GND: 48.286,17.517 69.021,25.017
  rectangle net GND: 13.984,24.722 28.1,25.017
  rectangle net GND: 9.416,17.517 13.999,22.901
  rectangle net GND: 86.11,24.722 97.914,25.017
  rectangle net C5: 17.031,25.131 19.272,25.669
  rectangle net U1: 14.096,25.131 15.989,25.669
  rectangle net GND: 1,17.517 9.485,25.017
  rectangle net GND: 111.16,0 117.44,2.54
  rectangle net GND: 60.36,0 66.64,2.54
  rectangle net GND: 111.16,48.26 117.44,50.8
  rectangle net GND: 60.36,48.26 66.64,50.8
  region net EQ1: 27.958,25.669 28.099,25.55 28.099,25.25 27.958,25.131
  region net GND: 81.311,25.05 81.311,25.017 81.17,25.017
  region net GND: 28.099,25.75 28.099,25.783 27.958,25.783
  region net GND: 28.099,25.05 28.099,25.017 27.958,25.017
  region net U2: 33.04,25.669 32.899,25.55 32.899,25.25 33.04,25.131
  region net GND: 32.899,25.75 32.899,25.783 33.041,25.783
  region net GND: 32.899,25.05 32.899,25.017 33.041,25.017
  region net GND: 86.111,25.05 86.111,25.017 86.252,25.017
  region net GND: 86.111,25.75 86.111,25.783 86.252,25.783
  region net U4: 86.252,25.669 86.111,25.55 86.111,25.25 86.252,25.131
  region net EQ2: 81.17,25.669 81.311,25.55 81.311,25.25 81.17,25.131
  region net GND: 81.311,25.75 81.311,25.783 81.169,25.783
  pour cut-out: 80.937,19.067 82.774,19.067 82.774,17.927 80.937,17.927
  pour cut-out: 82.778,20.078 81.569,20.078 81.569,20.898 82.778,20.898
  pour cut-out: 29.572,20.33 28.356,20.33 28.356,21.15 29.572,21.15
  pour cut-out: 27.724,19.084 29.518,19.084 29.518,17.944 27.724,17.944
  region net GND: 43.788,25.725 43.716,25.786 43.788,25.786
  pour cut-out: 35.452,22.818 34.58,22.818 34.58,23.638 35.452,23.638
  pour cut-out: 34.732,21.63 36.082,21.63 36.082,20.49 34.732,20.49
  pour cut-out: 26.347,22.799 25.478,22.799 25.478,23.619 26.347,23.619
  pour cut-out: 24.848,21.672 26.197,21.672 26.197,20.532 24.848,20.532
  region net GND: 102.413,25.725 102.485,25.786 102.413,25.786
  region net U5: 102.524,25.669 102.413,25.575 102.413,25.225 102.524,25.131
  region net GND: 102.413,25.075 102.485,25.014 102.413,25.014
  region net GND: 97.913,25.075 97.841,25.014 97.913,25.014
  region net C4: 9.375,25.669 9.485,25.575 9.485,25.225 9.375,25.131
  region net C20: 97.802,25.669 97.913,25.575 97.913,25.225 97.802,25.131
  region net GND: 97.913,25.725 97.841,25.786 97.913,25.786
  pour cut-out: 98.138,31.06 99.477,31.06 99.477,29.92 98.138,29.92
  pour cut-out: 99.641,28.3 98.768,28.3 98.768,29.12 99.641,29.12
  region net GND: 48.288,25.075 48.36,25.014 48.288,25.014
  region net U3: 48.399,25.669 48.288,25.575 48.288,25.225 48.399,25.131
  region net GND: 48.288,25.725 48.36,25.786 48.288,25.786
  region net GND: 43.788,25.075 43.716,25.014 43.788,25.014
  region net C18: 43.677,25.669 43.788,25.575 43.788,25.225 43.677,25.131
  pour cut-out: 45.516,28.3 44.643,28.3 44.643,29.12 45.516,29.12
  pour cut-out: 44.013,31.06 45.352,31.06 45.352,29.92 44.013,29.92
  pour cut-out: 11.213,28.3 10.341,28.3 10.341,29.12 11.213,29.12
  pour cut-out: 9.712,31.06 11.049,31.06 11.049,29.92 9.712,29.92
  pour cut-out: 88.573,23.009 87.705,23.009 87.705,23.829 88.573,23.829
  pour cut-out: 87.852,21.954 89.201,21.954 89.201,20.814 87.852,20.814
  pour cut-out: 77.605,21.161 79.451,21.161 79.451,20.021 77.605,20.021
  pour cut-out: 79.209,22.108 78.29,22.108 78.29,22.928 79.209,22.928
  region net GND: 13.985,25.725 14.058,25.786 13.985,25.786
  region net U1: 14.096,25.669 13.985,25.575 13.985,25.225 14.096,25.131
  region net GND: 13.985,25.075 14.058,25.014 13.985,25.014
  region net GND: 9.485,25.725 9.413,25.786 9.485,25.786
  region net GND: 9.485,25.075 9.413,25.014 9.485,25.014

## Silkscreen, mask and mechanical layers (free items; w line width, h text height)
Top Overlay:
  text "+5V" at 180.105,41.023 h0.8
  text "-5V" at 123.444,4.914 h0.8
  text "LE" at 94.786,3.258 h0.8